# Altium PCB 3轴5.2-PCB-V3.3.PcbDoc (part 2 of 2)
Units mil, origin at the board's own origin, x right, y up, seen from the top; angles counter-clockwise.
Board outline 6000 x 4000 mil, 2 copper layers (Top Layer, Bottom Layer); 198 components, 135 nets, 695 pads, 606 vias.
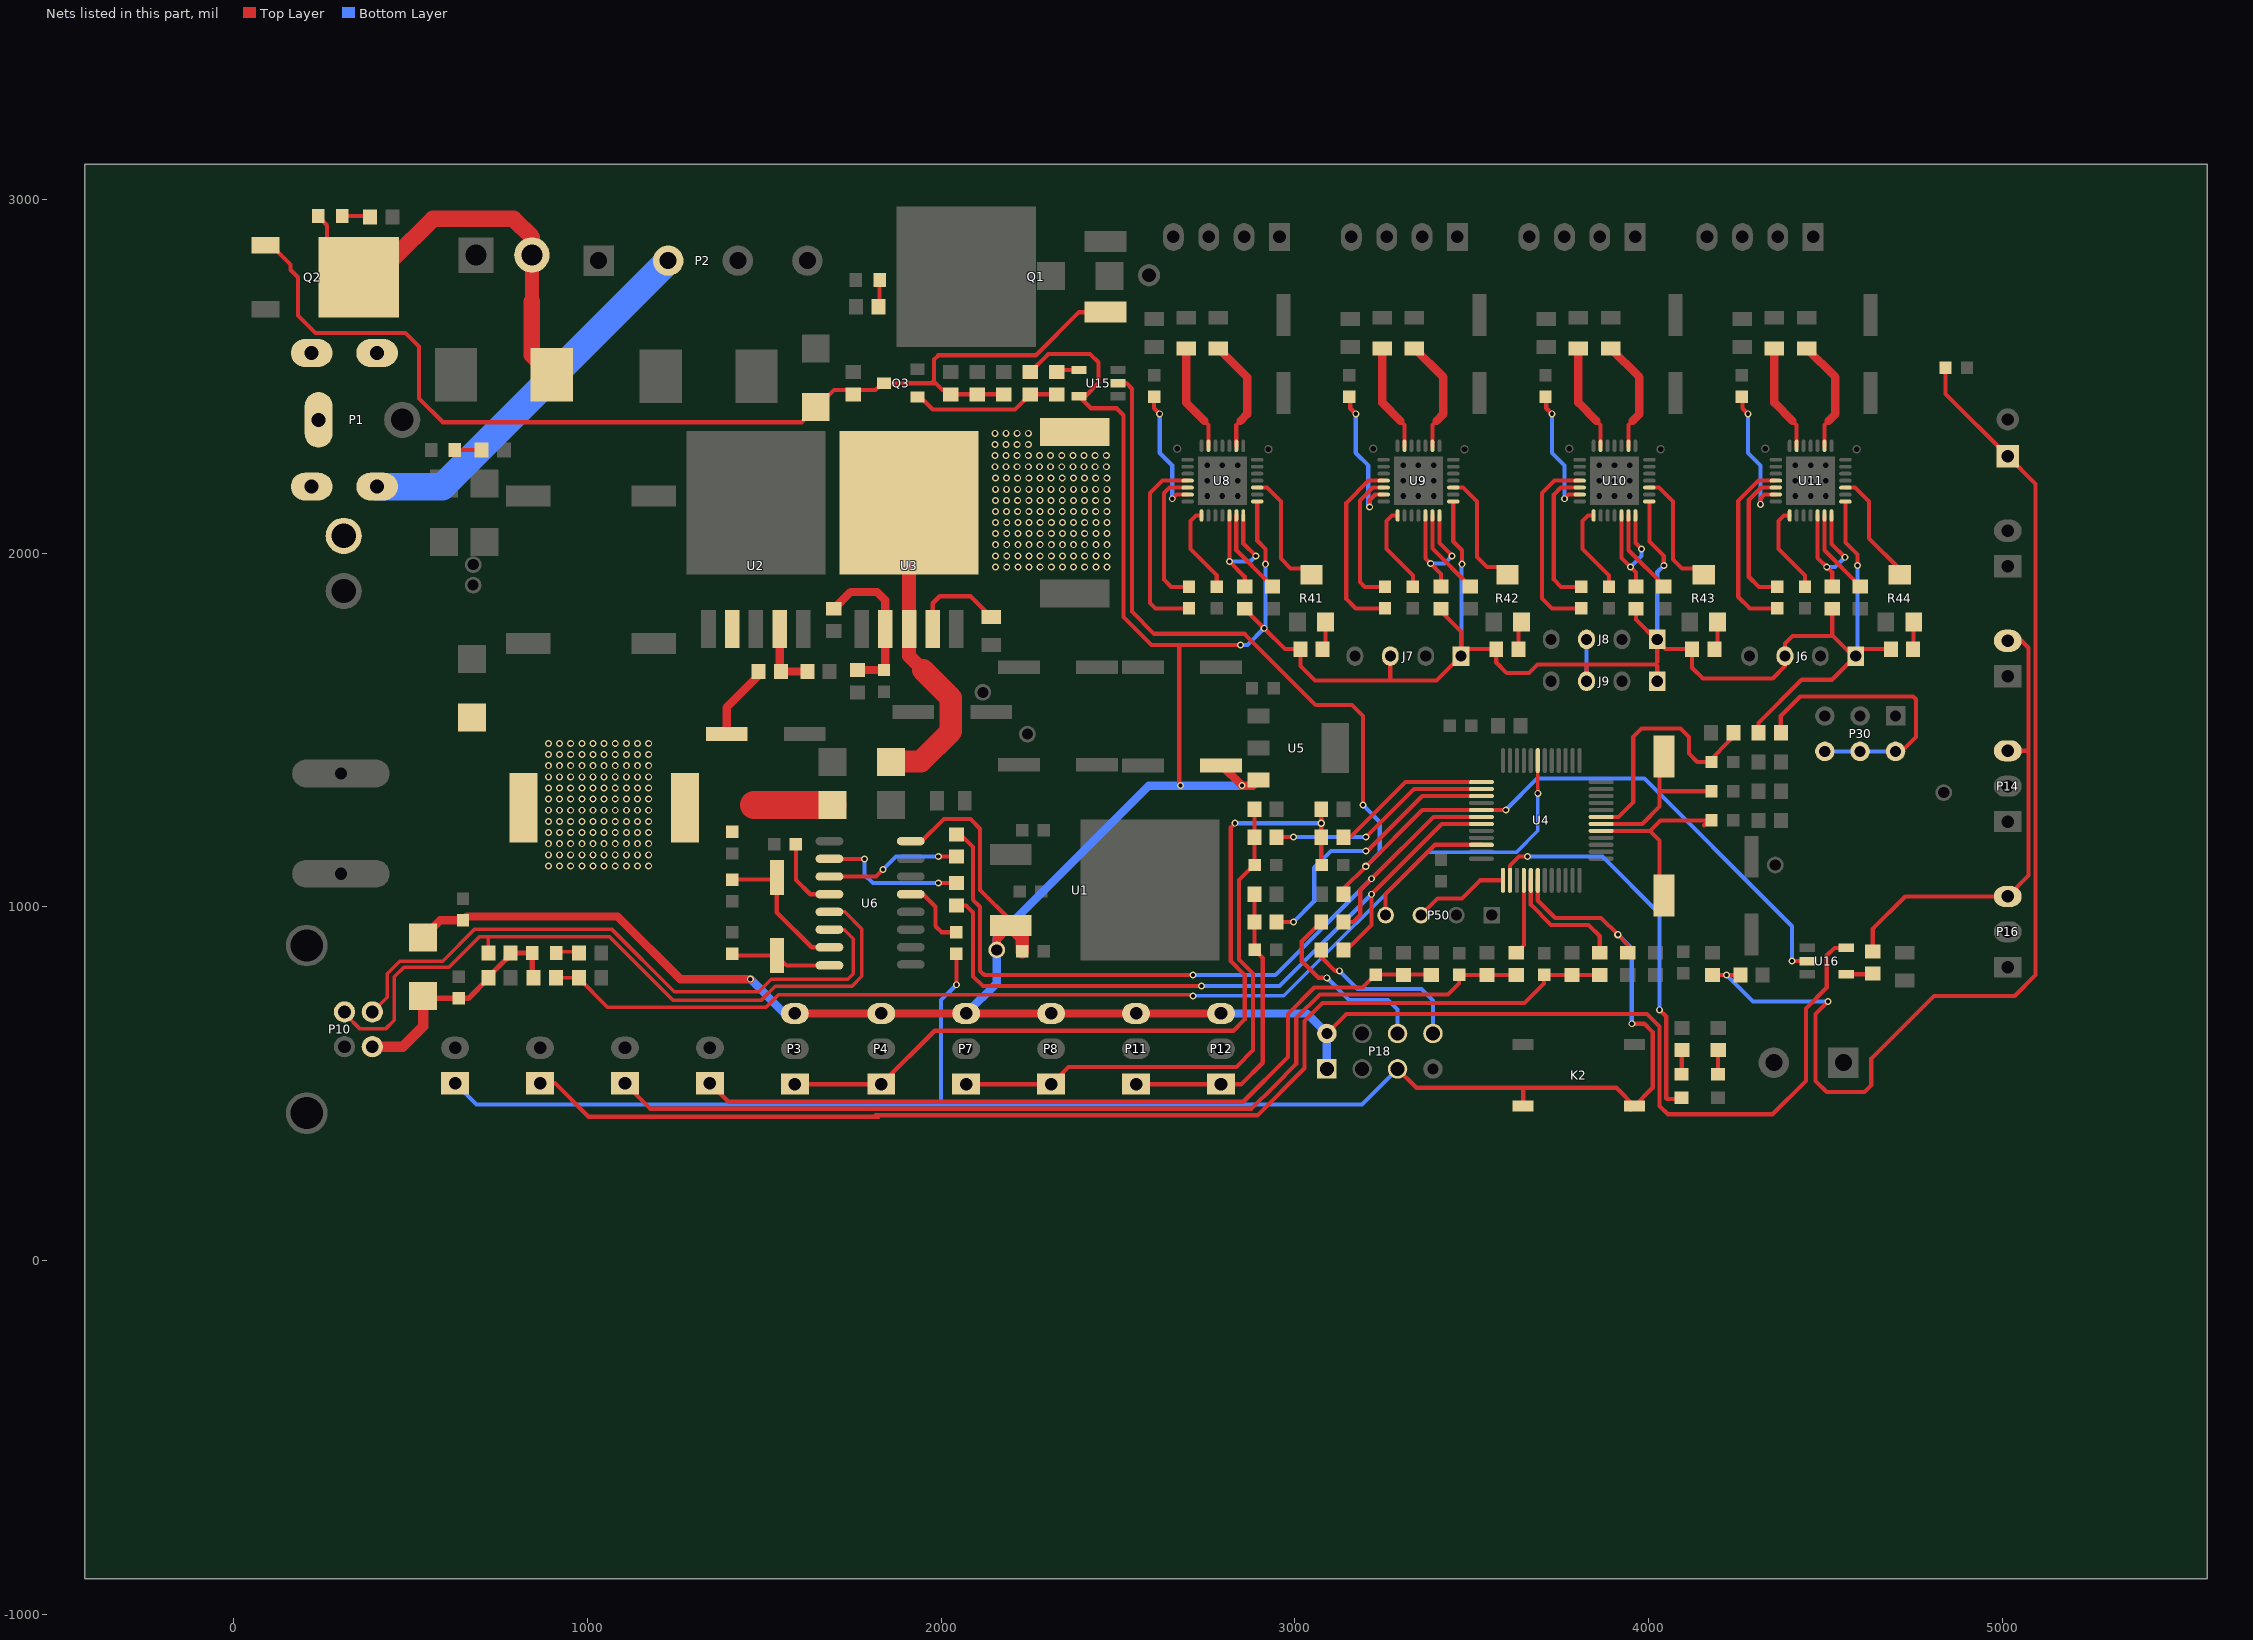
[diagram p2: the nets of this part, all layers, seen from the top]

## Via types
v1: diameter 19.68, hole 11.81, Top Layer to Bottom Layer, 590 vias
v2: diameter 20.87, hole 11.81, Top Layer to Bottom Layer, 9 vias
v3: diameter 19.68, hole 11.81, Top Layer to Bottom Layer, tented both sides, 7 vias

## Nets (pads, with @x,y where several pads share a name; then routed paths per layer and width w, separated by ;. In a path a pad name is that pad's centre, name@x,y a point inside that pad or via, vN(x,y) a via of type N, cw(c..) or ccw(c..) an arc to the next point about the centre after c; other vN are vias at no path point) (continued)
NetC4_1: C4.1 U3.4 | length 265.3
  Top Layer w11.81: U3.4@1976.38,1785.39 1976.38,1858.27 1996.06,1877.95 2082.68,1877.95 C4.1@2137.8,1822.83
NetC10_1: C10.1 C14.2 D7.1 L2.2 R6.2 | length 436.6
  Top Layer w23.62: C10.1@1393.7,1488.19 1393.7,1562.99 1484.25,1653.55 R6.2@1484.25,1665.35
  Top Layer w78.74: 1471.02,1287.4 D7.1@1692.91,1287.4
NetC17_2: C17.2 P3.1 P4.1 R11.1 R60.2 | length 2325.6
  Top Layer w11.81: P3.1@1586.61,498.43 P4.1@1830.71,498.43 1981.89,649.61 2826.77,649.61 2858.27,681.1 2858.27,807.09 2818.9,846.46 2818.9,1224.41 v1(2830.71,1236.22) ; R11.1@3074.81,1275.59 v2(3074.81,1236.22) 3074.81,1119.1 C17.2@3075.8,1118.11
  Bottom Layer w11.81: v1(2830.71,1236.22) v2(3074.81,1236.22)
NetC20_2: C20.2 P7.1 P8.1 R14.1 R61.2 | length 1567.6
  Top Layer w11.81: P7.1@2070.87,498.43 P8.1@2311.02,498.43 2359.84,547.24 2834.65,547.24 2881.89,594.49 2881.89,811.02 2842.52,850.39 2842.52,1075.79 C20.2@2885.83,1119.1 ; R14.1@2885.83,1275.59 R61.2@2885.83,1196.85 C20.2@2885.83,1119.1 ; C20.2@2886.83,1118.11 C20.2@2885.83,1119.1
NetC23_1: C23.1 U6.4 | length 212.7
  Top Layer w11.81: C23.1@1589.56,1177.17 1589.56,1075.8 1629.92,1035.43 U6.4@1684.21,1035.43
NetC25_2: C25.2 P23.1 R90.1 R91.2 | length 3274.2
  Top Layer w11.81: R91.2@4181.1,807.09 v1(4220.47,807.09) R90.1@4259.84,807.09 ; v1(4507.87,732.28) 4472.44,696.85 4472.44,507.87 4503.94,476.38 4610.24,476.38 4629.92,496.06 4629.92,570.87 4807.09,748.03 5035.43,748.03 5094.49,807.09 5094.49,2195.28 P23.1@5015.75,2274.02 4839.58,2450.19 C25.2@4839.58,2523.62
  Bottom Layer w11.81: v1(4220.47,807.09) 4295.28,732.28 v1(4507.87,732.28)
NetC26_2: C26.2 P11.1 P12.1 R19.1 R62.2 | length 869.5
  Top Layer w11.81: P11.1@2551.18,498.43 P12.1@2791.34,498.43 2848.82,498.43 2909.45,559.06 2909.45,855.33 C26.2@2886.83,877.95 2885.83,878.95 R62.2@2885.83,956.69 R19.1@2885.83,1035.43
NetC27_1: C27.1 U6.13 | length 205.8
  Top Layer w11.81: U6.13@1914.21,1035.43 1948.82,1035.43 1984.25,1000 1984.25,944.88 2001,928.14 C27.1@2043.31,928.14
NetC38_1: C38.1 U8.4 | length 548.1
  Top Layer w11.81: U8.4@2696.86,2204.72 2625.98,2204.72 2590.55,2169.29 2590.55,1858.76 2605.8,1843.52 C38.1@2700.79,1843.52
NetC38_2: C38.2 U8.5 | length 397
  Top Layer w11.81: U8.5@2696.86,2185.02 2645.65,2185.02 2629.92,2169.29 2629.92,1925.2 2650.6,1904.52 C38.2@2700.79,1904.52
NetC39_1: C39.1 U9.4 | length 523.7
  Top Layer w11.81: U9.4@3251.19,2204.72 3208.66,2204.72 3145.67,2141.73 3145.67,1870.08 3172.23,1843.52 C39.1@3255.12,1843.52
NetC39_2: C39.2 U9.5 | length 389.1
  Top Layer w11.81: U9.5@3251.19,2185.02 3220.46,2185.02 3184.25,2148.82 3184.25,1918.11 3197.85,1904.52 C39.2@3255.12,1904.52
NetC40_1: C40.1 U10.4 | length 551.7
  Top Layer w11.81: 3738.58,1843.52 3727.35,1843.52 ; U10.4@3805.52,2204.72 3734.65,2204.72 3699.21,2169.29 3699.21,1871.65 3727.35,1843.52 ; C40.1@3809.45,1843.52 3727.35,1843.52
NetC40_2: C40.2 U10.5 | length 407.3
  Top Layer w11.81: U10.5@3805.52,2185.02 3751.95,2185.02 3732.28,2165.35 3732.28,1925.2 3752.96,1904.52 C40.2@3809.45,1904.52
NetC41_1: C41.1 U11.4 | length 524.8
  Top Layer w11.81: U11.4@4359.85,2204.72 4311.02,2204.72 4253.54,2147.24 4253.54,1876.38 4286.41,1843.52 C41.1@4363.78,1843.52
NetC41_2: C41.2 U11.5 | length 399.7
  Top Layer w11.81: U11.5@4359.85,2185.02 4318.88,2185.02 4283.46,2149.61 4283.46,1964.56 4283.46,1933.07 4312.02,1904.52 C41.2@4363.78,1904.52
NetC42_1: C42.1 U8.6 | length 365.7
  Top Layer w11.81: C42.1@2602.36,2445.88 2602.36,2409.45 v1(2618.11,2393.7) ; v1@2657.48,2153.54 v1(2653.54,2153.54) 2665.32,2165.32 U8.6@2696.86,2165.32
  Bottom Layer w11.81: v1(2618.11,2393.7) 2618.11,2283.46 2653.54,2248.03 v1(2653.54,2153.54)
NetC43_1: C43.1 U9.6 | length 412.3
  Top Layer w11.81: C43.1@3156.69,2445.88 3156.69,2409.45 v1(3172.44,2393.7) ; v1(3211.81,2129.92) 3211.81,2149.78 3227.36,2165.32 U9.6@3251.19,2165.32
  Bottom Layer w11.81: v1(3172.44,2393.7) 3172.44,2283.46 3207.87,2248.03 3207.87,2161.41 ; 3207.87,2153.54 3207.87,2161.41 ; v1(3211.81,2129.92) 3207.87,2133.86 3207.87,2161.41
NetC44_1: C44.1 U10.6 | length 365.7
  Top Layer w11.81: C44.1@3711.02,2445.88 3711.02,2409.45 v1(3726.77,2393.7) ; v1@3766.14,2153.54 v1(3762.2,2153.54) 3773.99,2165.32 U10.6@3805.52,2165.32
  Bottom Layer w11.81: v1(3726.77,2393.7) 3726.77,2283.46 3762.2,2248.03 v1(3762.2,2153.54)
NetC45_1: C45.1 U11.6 | length 393.2
  Top Layer w11.81: C45.1@4265.35,2445.88 4265.35,2409.45 v1(4281.1,2393.7) ; v1(4316.54,2137.8) 4316.54,2153.54 4328.32,2165.32 U11.6@4359.85,2165.32
  Bottom Layer w11.81: v1(4281.1,2393.7) 4281.1,2283.46 4316.54,2248.03 v1(4316.54,2137.8)
NetC46_1: C46.1 U8.8 | length 255
  Top Layer w11.81: U8.8@2736.18,2106.29 2720.47,2106.29 2704.72,2090.55 2704.72,2011.44 2779.53,1936.63 C46.1@2779.53,1904.52
NetC47_1: C47.1 U9.8 | length 250.4
  Top Layer w11.81: U9.8@3290.51,2106.29 3274.8,2106.29 3259.05,2090.55 3259.05,2011.44 3333.86,1936.63 ; C47.1@3333.86,1904.52 3333.86,1932.04
NetC48_1: C48.1 U10.8 | length 255
  Top Layer w11.81: U10.8@3844.84,2106.29 3829.13,2106.29 3813.39,2090.55 3813.39,2011.44 3888.19,1936.63 3888.19,1925.19 C48.1@3888.19,1904.52
NetC49_1: C49.1 U11.8 | length 253.5
  Top Layer w11.81: U11.8@4399.17,2106.29 4383.46,2106.29 4367.72,2090.55 4367.72,2011.44 4442.52,1936.63 ; C49.1@4442.52,1904.52 4442.52,1935.18
NetC54_1: C54.1 U6.7 Y1.2 | length 416.6
  Top Layer w11.81: C54.1@1409.45,1076.75 1529.5,1076.75 Y1.2@1535.43,1082.68 1535.43,984.25 1634.25,885.43 U6.7@1684.21,885.43
NetC55_1: C55.1 U6.8 Y1.1 | length 288.4
  Top Layer w11.81: C55.1@1409.45,867.14 1414.39,862.2 Y1.1@1535.43,862.2 1563.38,834.25 U6.8@1684.21,834.25
NetC56_1: C56.1 R1.1 R7.2 U3.2 | length 448.3
  Top Layer w23.62: R7.2@1696.85,1842.52 1744.09,1889.76 1818.9,1889.76 1842.52,1866.14 U3.2@1842.52,1785.39 1842.52,1673.23 C56.1@1838.58,1669.29 R1.1@1763.78,1669.29
NetC60_2: C60.2 P6.1 R63.2 R66.1 | length 3306.8
  Top Layer w11.81: P6.1@866.14,501.18 908.27,501.18 1003.06,406.39 1811.02,406.39 ; 1822.83,406.39 1811.02,406.39 ; R63.2@3862.2,807.09 R66.1@3783.46,807.09 3705.72,807.09 C60.2@3704.72,808.08 3704.72,783.46 3649.61,728.35 3078.74,728.35 3027.56,677.17 3027.56,543.31 2894.57,410.32 1814.96,410.32 1811.02,406.39
NetC61_2: C61.2 P9.1 R64.2 R67.1 | length 2798.1
  Top Layer w11.81: P9.1@1106.3,501.18 1106.3,500 1177.17,429.13 2877.95,429.13 2940.94,492.12 3003.94,555.12 3003.94,685.04 3070.87,751.97 3433.07,751.97 3464.57,783.46 C61.2@3464.57,808.08 3465.56,807.09 R67.1@3543.31,807.09 R64.2@3625.98,807.09
NetC62_2: C62.2 P13.1 R65.2 R68.1 | length 2281.8
  Top Layer w11.81: P13.1@1346.46,501.18 1398.82,448.82 2854.33,448.82 2980.32,574.8 2980.32,696.85 3055.12,771.65 3118.1,771.65 3191.92,771.65 C62.2@3228.35,808.08 3384.83,808.08 R65.2@3385.83,807.09
NetD4_1: D4.1 R3.2 | length 71.8
  Top Layer w11.81: D4.1@4196.18,522.99 4196.85,523.66 R3.2@4196.85,594.49
NetD5_2: D5.2 L2.1 U2.2
  other v1: 889.76,1115.42 921.26,1115.42 952.76,1115.42 984.25,1115.42 1015.75,1115.42 1047.24,1115.42 1078.74,1115.42 1110.24,1115.42 1141.73,1115.42 1173.23,1115.42 889.76,1146.92 921.26,1146.92 952.76,1146.92 984.25,1146.92 1015.75,1146.92 1047.24,1146.92 1078.74,1146.92 1110.24,1146.92 1141.73,1146.92 1173.23,1146.92 889.76,1178.41 921.26,1178.41 952.76,1178.41 984.25,1178.41 1015.75,1178.41 1047.24,1178.41 1078.74,1178.41 1110.24,1178.41 1141.73,1178.41 1173.23,1178.41 889.76,1209.91 921.26,1209.91 952.76,1209.91 984.25,1209.91 1015.75,1209.91 1047.24,1209.91 1078.74,1209.91 1110.24,1209.91 1141.73,1209.91 1173.23,1209.91 889.76,1241.4 921.26,1241.4 952.76,1241.4 984.25,1241.4 1015.75,1241.4 1047.24,1241.4 1078.74,1241.4 1110.24,1241.4 1141.73,1241.4 1173.23,1241.4 889.76,1272.9 921.26,1272.9 952.76,1272.9 984.25,1272.9 1015.75,1272.9 1047.24,1272.9 1078.74,1272.9 1110.24,1272.9 1141.73,1272.9 1173.23,1272.9 889.76,1304.4 921.26,1304.4 952.76,1304.4 984.25,1304.4 1015.75,1304.4 1047.24,1304.4 1078.74,1304.4 1110.24,1304.4 1141.73,1304.4 1173.23,1304.4 889.76,1335.89 921.26,1335.89 952.76,1335.89 984.25,1335.89 1015.75,1335.89 1047.24,1335.89 1078.74,1335.89 1110.24,1335.89 1141.73,1335.89 1173.23,1335.89 889.76,1367.39 921.26,1367.39 952.76,1367.39 984.25,1367.39 1015.75,1367.39 1047.24,1367.39 1078.74,1367.39 1110.24,1367.39 1141.73,1367.39 1173.23,1367.39 889.76,1398.88 921.26,1398.88 952.76,1398.88 984.25,1398.88 1015.75,1398.88 1047.24,1398.88 1078.74,1398.88 1110.24,1398.88 1141.73,1398.88 1173.23,1398.88 889.76,1430.38 921.26,1430.38 952.76,1430.38 984.25,1430.38 1015.75,1430.38 1047.24,1430.38 1078.74,1430.38 1110.24,1430.38 1141.73,1430.38 1173.23,1430.38 889.76,1461.88 921.26,1461.88 952.76,1461.88 984.25,1461.88 1015.75,1461.88 1047.24,1461.88 1078.74,1461.88 1110.24,1461.88 1141.73,1461.88 1173.23,1461.88
NetD6_2: D6.2 L1.1 U3.3 | length 731.1
  Top Layer w39.37: U3.3@1909.45,1977.62 U3.3@1909.45,1785.39 1909.45,1708.66 1948.82,1669.29
  Top Layer w62.99: D6.2@1862.2,1410.83 1942.32,1410.83 2027.56,1496.06 2027.56,1590.55 1948.82,1669.29
  other v1: 2154.08,1960.63 2185.58,1960.63 2217.08,1960.63 2248.57,1960.63 2280.07,1960.63 2311.56,1960.63 2343.06,1960.63 2374.56,1960.63 2406.05,1960.63 2437.55,1960.63 2469.04,1960.63 2154.08,1992.13 2185.58,1992.13 2217.08,1992.13 2248.57,1992.13 2280.07,1992.13 2311.56,1992.13 2343.06,1992.13 2374.56,1992.13 2406.05,1992.13 2437.55,1992.13 2469.04,1992.13 2154.08,2023.62 2185.58,2023.62 2217.08,2023.62 2248.57,2023.62 2280.07,2023.62 2311.56,2023.62 2343.06,2023.62 2374.56,2023.62 2406.05,2023.62 2437.55,2023.62 2469.04,2023.62 2154.08,2055.12 2185.58,2055.12 2217.08,2055.12 2248.57,2055.12 2280.07,2055.12 2311.56,2055.12 2343.06,2055.12 2374.56,2055.12 2406.05,2055.12 2437.55,2055.12 2469.04,2055.12 2154.08,2086.61 2185.58,2086.61 2217.08,2086.61 2248.57,2086.61 2280.07,2086.61 2311.56,2086.61 2343.06,2086.61 2374.56,2086.61 2406.05,2086.61 2437.55,2086.61 2469.04,2086.61 2153.54,2117.39 2185.04,2117.39 2216.54,2117.39 2248.03,2117.39 2279.53,2117.39 2311.02,2117.39 2342.52,2117.39 2374.02,2117.39 2405.51,2117.39 2437.01,2117.39 2468.5,2117.39 2153.54,2148.88 2185.04,2148.88 2216.54,2148.88 2248.03,2148.88 2279.53,2148.88 2311.02,2148.88 2342.52,2148.88 2374.02,2148.88 2405.51,2148.88 2437.01,2148.88 2468.5,2148.88 2153.54,2180.38 2185.04,2180.38 2216.54,2180.38 2248.03,2180.38 2279.53,2180.38 2311.02,2180.38 2342.52,2180.38 2374.02,2180.38 2405.51,2180.38 2437.01,2180.38 2468.5,2180.38 2153.54,2211.87 2185.04,2211.87 2216.54,2211.87 2248.03,2211.87 2279.53,2211.87 2311.02,2211.87 2342.52,2211.87 2374.02,2211.87 2405.51,2211.87 2437.01,2211.87 2468.5,2211.87 2152.12,2244.09 2183.61,2244.09 2215.11,2244.09 2246.6,2244.09 2278.1,2244.09 2309.6,2244.09 2341.09,2244.09 2372.59,2244.09 2404.08,2244.09 2435.58,2244.09 2467.08,2244.09 2152.12,2275.59 2183.61,2275.59 2215.11,2275.59 2246.6,2275.59 2278.1,2275.59 2309.6,2275.59 2341.09,2275.59 2372.59,2275.59 2404.08,2275.59 2435.58,2275.59 2467.08,2275.59 2152.12,2307.09 2183.61,2307.09 2215.11,2307.09 2246.6,2307.09 2152.12,2338.58 2183.61,2338.58 2215.11,2338.58 2246.6,2338.58
NetD10_1: D10.1 R4.1 | length 75.7
  Top Layer w11.81: D10.1@625.35,2292.01 626.02,2291.34 R4.1@700.79,2291.34
NetD12_1: D12.1 R71.1 | length 71.8
  Top Layer w11.81: D12.1@4093.82,522.99 4093.82,593.82 R71.1@4094.49,594.49
NetD12_2: D12.2 U4.38 | length 1116.7
  Top Layer w11.81: U4.38@3608.27,1074.8 3608.27,1116.14 3633.86,1141.73 v1(3657.48,1141.73) ; v1(4031.5,708.66) 4050.31,689.85 4050.31,457.57 4051.81,456.06 D12.2@4093.82,456.06
  Bottom Layer w11.81: v1(3657.48,1141.73) 3870.08,1141.73 4031.5,980.31 v1(4031.5,708.66)
NetD13_2: D13.2 R76.2 | length 62.9
  Top Layer w10: D13.2@912.59,873.35 912.92,873.02 R76.2@975.37,873.02
NetD15_1: D15.1 R21.2 | length 76.8
  Top Layer w11.81: R21.2@1822.83,2696.85 1826.14,2700.16 D15.1@1826.14,2772.32
NetD16_1: D16.1 R58.2 | length 80.6
  Top Layer w11.81: D16.1@306.46,2953.09 382.8,2953.09 R58.2@385.83,2950.06
NetD16_2: D16.2 DZ1.1 P17.2 Q2.2 | length 1305.4
  Top Layer w11.81: D16.2@239.53,2953.09 239.53,2951.12 263.78,2926.87 263.78,2869.5 Q2.2@353.3,2779.98
  Top Layer w39.37: 843.04,2711.29 P17.2@843.04,2842.52 P17.2@843.04,2850.39
  Top Layer w47.24: Q2.2@365.11,2768.17 Q2.2@435.98,2839.04 ; Q2.2@365.16,2768.13 429.44,2832.41 450.52,2832.41 562.99,2944.88 791.34,2944.88 843.04,2893.18 P17.2@843.04,2850.39 ; 843.04,2711.29 843.04,2559.91 DZ1.1@899.02,2503.94
NetDZ4_2: DZ4.2 Q1.1 Q2.1 Q3.2 R27.1 R57.1 R77.1 R78.1 | length 3116.1
  Top Layer w11.81: Q2.1@89.52,2870.53 105.27,2870.53 160.28,2815.53 160.28,2801 181.41,2779.88 181.41,2671.81 231.16,2622.05 485.16,2622.05 523.62,2583.59 523.62,2437.37 590.91,2370.08 1606.3,2370.08 1696.85,2460.63 1814.96,2460.63 1834.65,2480.31 Q3.2@1838.58,2480.31 1972.44,2480.31 ; R27.1@2027.56,2448.82 R77.1@2102.36,2448.82 R78.1@2177.17,2448.82 ; R27.1@2027.56,2460.63 2003.93,2460.63 1984.25,2480.31 1972.44,2480.31 ; Q1.1@2464.57,2681.1 2389.76,2681.1 2267.72,2559.06 1992.13,2559.06 1980.32,2547.24 1980.32,2488.19 1972.44,2480.31
NetK1_1: P1.2 P1.3 P1.4 P1.5 P1.6 P2.2 P15.1 | length 1115.1
  Bottom Layer w11.81: P2.2@1228.35,2799.21 P2.2@1228.35,2826.77
  Bottom Layer w78: P1.4@405.51,2187.8 589.37,2187.8 P2.2@1228.35,2826.77
NetP18_6: P18.6 R22.2 | length 528.4
  Top Layer w11.81: R22.2@3074.81,956.69 3019.68,901.57 3019.68,846.46 3066.93,799.21 v1(3090.55,799.21)
  Bottom Layer w11.81: v1(3090.55,799.21) 3153.54,736.22 3263.78,736.22 3290.55,709.45 P18.6@3290.55,641.73
NetP18_8: P18.8 R25.2 | length 480
  Top Layer w11.81: R25.2@3074.81,877.95 3074.81,858.27 3114.17,818.9 v1(3125.98,818.9)
  Bottom Layer w11.81: v1(3125.98,818.9) 3177.17,767.71 3358.27,767.71 3390.55,735.43 P18.8@3390.55,641.73
NetP30_2: P30.2 P30.4 P30.6 R52.2 | length 836
  Top Layer w11.81: R52.2@4374.01,1492.13 4374.01,1500 4374.01,1539.37 4429.13,1594.49 4511.8,1594.49 4748.03,1594.49 4755.91,1586.61 4755.91,1480.32 4714.96,1439.37 P30.2@4698.43,1439.37
  Bottom Layer w11.81: P30.6@4498.43,1439.37 P30.4@4598.43,1439.37 P30.2@4698.43,1439.37
NetQ3_1: Q3.1 R80.2 R81.1 | length 536.6
  Top Layer w11.81: Q3.1@1940.94,2440.94 1976.38,2405.51 ; 2094.49,2405.51 1976.38,2405.51 ; R80.2@2326.77,2448.82 R81.1@2251.97,2448.82 2208.66,2405.51 1976.38,2405.51
NetR6_1: R6.1 R8.2 U2.4 | length 196.5
  Top Layer w23.62: U2.4@1543.31,1785.39 1543.31,1669.29 R6.1@1547.24,1665.35 R8.2@1622.05,1665.35
NetR15_1: R15.1 U6.2 | length 413.8
  Top Layer w11.81: U6.2@1684.21,1135.43 v1(1783.46,1135.43) ; v1@1992.13,1066.92 R15.1@2043.31,1066.92
  Bottom Layer w11.81: v1(1783.46,1135.43) 1783.46,1090.55 1807.09,1066.93 v1(1992.13,1066.93)
NetR16_1: R16.1 U6.3 | length 382.4
  Top Layer w11.81: U6.3@1684.21,1085.43 1816.14,1085.43 v1(1836.16,1105.45) ; v1(1992.13,1141.73) R16.1@2043.31,1141.73
  Bottom Layer w11.81: v1(1836.16,1105.45) 1872.44,1141.73 v1(1992.13,1141.73)
NetR29_1: R29.1 U8.27 | length 301.7
  Top Layer w11.81: 2744.09,2374.02 2755.88,2362.23 U8.27@2755.88,2303.14
  Top Layer w23.62: R29.1@2692.91,2578.74 2692.91,2425.17 2744.06,2374.02
NetR30_2: R30.2 U8.23 | length 322
  Top Layer w11.81: U8.23@2834.68,2303.14 2834.68,2362.23 2846.46,2374.02
  Top Layer w23.62: R30.2@2783.98,2578.74 2865.4,2497.32 2865.4,2392.96 2846.46,2374.02
NetR31_1: R31.1 U9.27 | length 301.7
  Top Layer w11.81: 3298.43,2374.02 3310.21,2362.23 U9.27@3310.21,2303.14
  Top Layer w23.62: R31.1@3247.24,2578.74 3247.24,2425.17 3298.4,2374.02
NetR32_2: R32.2 U9.23 | length 322
  Top Layer w11.81: U9.23@3389.01,2303.14 3389.01,2362.23 3400.79,2374.02
  Top Layer w23.62: R32.2@3338.31,2578.74 3419.73,2497.32 3419.73,2392.96 3400.79,2374.02
NetR33_1: R33.1 U10.27 | length 301.7
  Top Layer w11.81: 3852.76,2374.02 3864.54,2362.23 U10.27@3864.54,2303.14
  Top Layer w23.62: R33.1@3801.58,2578.74 3801.58,2425.17 3852.73,2374.02
NetR34_2: R34.2 U10.23 | length 322
  Top Layer w11.81: U10.23@3943.34,2303.14 3943.34,2362.23 3955.12,2374.02
  Top Layer w23.62: R34.2@3892.64,2578.74 3974.06,2497.32 3974.06,2392.96 3955.12,2374.02
NetR35_1: R35.1 U11.27 | length 301.7
  Top Layer w11.81: 4407.09,2374.02 4418.87,2362.23 U11.27@4418.87,2303.14
  Top Layer w23.62: R35.1@4355.91,2578.74 4355.91,2425.17 4407.06,2374.02
NetR36_2: R36.2 U11.23 | length 322
  Top Layer w11.81: U11.23@4497.67,2303.14 4497.67,2362.23 4509.45,2374.02
  Top Layer w23.62: R36.2@4446.97,2578.74 4528.39,2497.32 4528.39,2392.96 4509.45,2374.02
NetR37_1: R37.1 R41.3 | length 80
  Top Layer w11.81: R37.1@3078.74,1728.35 3086.61,1736.22 R41.3@3086.61,1805.12
NetR38_1: R38.1 R42.3 | length 80.3
  Top Layer w11.81: R38.1@3632.55,1728.35 3632.55,1796.72 R42.3@3640.95,1805.12
NetR39_1: R39.1 R43.3 | length 80.5
  Top Layer w11.81: R39.1@4186.35,1728.35 4195.28,1737.27 R43.3@4195.28,1805.12
NetR40_1: R40.1 R44.3 | length 80.7
  Top Layer w11.81: R40.1@4740.16,1728.35 4749.61,1737.8 R44.3@4749.61,1805.12
NetR41_2: R41.2 U8.17 | length 350
  Top Layer w11.81: U8.17@2893.71,2185.02 2921.27,2185.02 2960.63,2145.67 2960.63,1984.25 2988.19,1956.69 3029.53,1956.69 R41.2@3047.24,1938.98
NetR42_2: R42.2 U9.17 | length 347.2
  Top Layer w11.81: U9.17@3448.04,2185.02 3475.61,2185.02 3514.96,2145.67 3514.96,1988.98 3543.31,1960.63 3579.92,1960.63 R42.2@3601.58,1938.98
NetR43_2: R43.2 U10.17 | length 361.8
  Top Layer w11.81: U10.17@4002.37,2185.02 4029.94,2185.02 4069.29,2145.67 4069.29,2098.43 4069.29,1981.89 4094.49,1956.69 4155.91,1956.69 R43.2@4155.91,1938.98
NetR44_2: R44.2 U11.17 | length 325.8
  Top Layer w11.81: U11.17@4556.7,2185.02 4584.27,2185.02 4623.62,2145.67 4623.62,2133.85 4623.62,2041.73 4710.24,1955.12 R44.2@4710.24,1938.98
NetR45_2: R45.2 U8.12 U8.14 | length 428.9
  Top Layer w11.81: U8.12@2814.98,2106.29 v1(2814.98,1976.36) 2858.27,1933.07 R45.2@2858.27,1905.51 ; U8.14@2854.38,2106.29 2854.38,2027.51 v1(2889.76,1992.13)
  Bottom Layer w11.81: v1(2814.98,1976.36) 2874,1976.36 v1(2889.76,1992.13)
NetR46_2: R46.2 U9.12 U9.14 | length 406.8
  Top Layer w11.81: U9.12@3369.31,2106.29 3369.31,1985.02 v1(3384.24,1970.09) 3413.39,1940.94 R46.2@3413.39,1905.51 ; U9.14@3408.71,2106.29 3408.71,2028.3 3437.01,2000
  Bottom Layer w11.81: v1(3384.24,1970.09) 3422.85,1970.09 v1(3444.88,1992.13)
NetR47_2: R47.2 U10.12 U10.14 | length 383.6
  Top Layer w11.81: U10.12@3923.64,2106.29 3923.64,1985.81 v1(3948.82,1960.63) 3964.57,1944.88 R47.2@3964.57,1905.51 ; U10.14@3963.04,2106.29 3963.04,2029.09 v1(3980.32,2011.81)
  Bottom Layer w11.81: v1(3948.82,1960.63) 3980.32,1992.13 v1(3980.32,2011.81)
NetR48_2: R48.2 U11.12 U11.14 | length 414.4
  Top Layer w11.81: U11.12@4477.97,2106.29 4477.97,1986.6 v1(4503.94,1960.63) 4519.68,1944.88 R48.2@4519.68,1905.51 ; U11.14@4517.37,2106.29 4517.37,2025.94 v1(4555.12,1988.19)
  Bottom Layer w11.81: v1(4503.94,1960.63) 4527.56,1960.63 v1(4555.12,1988.19)
NetR53_2: R53.2 U8.13 | length 243.2
  Top Layer w11.81: U8.13@2834.68,2106.29 2834.68,2007.84 2927.16,1915.35 R53.2@2937.01,1905.51
NetR54_2: R54.2 U9.13 | length 245.1
  Top Layer w11.81: U9.13@3389.01,2106.29 3389.01,2012.57 R54.2@3496.06,1905.51
NetR55_2: R55.2 U10.13 | length 242.2
  Top Layer w11.81: U10.13@3943.34,2106.29 3943.34,2007.84 4043.31,1907.87 R55.2@4043.31,1905.51
NetR56_2: R56.2 U11.13 | length 242.5
  Top Layer w11.81: U11.13@4497.67,2106.29 4497.67,2007.84 4598.43,1907.08 R56.2@4598.43,1905.51
NetR59_1: R59.1 U16.4 | length 75.6
  Top Layer w11.81: U16.4@4559.06,809.06 4631.89,809.06 R59.1@4633.86,811.03
NetR80_1: R80.1 U15.4 | length 65.4
  Top Layer w11.81: R80.1@2326.77,2511.81 2332.68,2517.72 U15.4@2389.76,2517.72
NRST: C102.2 R104.2 U4.7 | length 693.3
  Top Layer w11.81: U4.7@3866.14,1253.94 3915.35,1253.94 3956.69,1295.28 3956.69,1480.32 3980.31,1503.94 4090.55,1503.94 4114.17,1480.32 4114.17,1433.07 4137.79,1409.45 C102.2@4178.16,1409.45 ; C102.2@4173.73,1413.88 4232.28,1472.44 R104.2@4232.28,1492.13
PROBE: R63.1 U4.41 | length 347.7
  Top Layer w11.81: U4.41@3667.32,1074.8 3667.32,1005.91 3724.41,948.82 3830.71,948.82 3862.2,917.32 R63.1@3862.2,870.08
PWM: P14.3 P16.3 P25.2 R59.2 | length 1336.9
  Top Layer w11.81: R59.2@4633.86,874.01 4633.86,937.01 4725.98,1029.13 P16.3@5015.75,1029.13 5074.8,1088.19 5074.8,1440.95 ; P14.3@5015.75,1440.95 5074.8,1440.95 ; P25.2@5015.75,1751.97 5055.12,1751.97 5074.8,1732.28 5074.8,1440.95
RST: C27.2 K2.1 K2.3 P5.1 P18.5 R72.2 U4.42 | length 4911.4
  Top Layer w11.81: v1(2043.31,779.53) C27.2@2043.31,867.14 ; P18.5@3290.55,541.73 3344.1,488.19 3649.61,488.19 ; K2.3@3645.67,437.01 3645.67,484.25 3649.61,488.19 ; U4.42@3687.01,1074.8 3687.01,1017.72 3736.22,968.5 3866.14,968.5 v2(3913.39,921.26) 3940.94,893.7 R72.2@3940.94,870.08 ; K2.1@3948.82,425.2 K2.1@3960.63,437.01 ; v1(3952.76,669.29) 3988.19,669.29 4011.81,645.67 4011.81,488.19 K2.1@3960.63,437.01 ; 3649.61,488.19 3909.45,488.19 K2.1@3960.63,437.01
  Bottom Layer w11.81: P5.1@625.98,501.18 686.22,440.94 2000,440.94 ; v1(2043.31,779.53) 2000,736.22 2000,440.94 ; P18.5@3290.55,541.73 3189.76,440.94 2000,440.94 ; v2(3913.39,921.26) 3952.76,881.89 v1(3952.76,669.29)
RUN: R64.1 U4.40 | length 213.7
  Top Layer w11.81: R64.1@3625.98,870.08 3647.64,891.73 U4.40@3647.64,1074.8
RXD: R15.2 R25.1 U4.31 | length 2069.6
  Top Layer w11.81: R15.2@2043.31,1003.94 2070.87,1003.94 2090.55,984.25 2090.55,803.15 2118.11,775.59 v1(2736.22,775.59) ; R25.1@3137.79,877.95 3145.67,877.95 3216.54,948.82 v1(3216.54,1035.43) 3415.35,1234.25 U4.31@3527.56,1234.25
  Bottom Layer w11.81: v1(2736.22,775.59) 2956.69,775.59 v1(3216.54,1035.43)
SPINDLE_PWM: R70.2 U4.29 U15.2 U16.2 | length 3639.6
  Top Layer w11.81: U15.2@2500,2480.32 2523.62,2480.31 2539.37,2464.57 2539.37,1834.65 2602.36,1771.65 2858.27,1771.65 3059.05,1570.87 3161.42,1570.87 3192.91,1539.37 v1(3192.91,1287.4) ; R70.2@3137.79,1035.43 3137.79,1051.18 v2(3200.79,1114.17) 3360.24,1273.62 U4.29@3527.56,1273.62 v1(3596.46,1273.62) ; v1(4405.51,846.46) U16.2@4448.82,846.46
  Bottom Layer w11.81: v1(3192.91,1287.4) 3240.16,1240.16 3240.16,1153.54 v2(3200.79,1114.17) ; v1(3596.46,1273.62) 3685.04,1362.2 3988.18,1362.2 4372.84,977.54 4405.51,944.87 v1(4405.51,846.46)
SWCLK: P50.3 U4.37 | length 272.7
  Top Layer w11.81: P50.3@3356.69,976.38 3403.94,1023.62 3472.44,1023.62 3523.62,1074.8 U4.37@3588.58,1074.8
SWDIO: P50.4 U4.34 | length 388.3
  Top Layer w11.81: P50.4@3256.69,976.38 3256.69,1036.22 3395.67,1175.2 U4.34@3527.56,1175.2
TXD: R16.2 R22.1 U4.30 | length 2199.3
  Top Layer w11.81: R16.2@2043.31,1204.72 2055.12,1204.72 2090.55,1169.29 2090.55,1019.69 2110.24,1000 2110.24,818.9 2122.05,807.09 v1(2712.6,807.09) ; R22.1@3137.79,956.69 3165.35,956.69 3185.04,976.38 3185.04,1047.24 v1(3217.04,1079.24) 3391.73,1253.94 U4.30@3527.56,1253.94
  Bottom Layer w11.81: v1(2712.6,807.09) 2944.88,807.09 v1(3217.04,1079.24)
USB-CHK: R74.2 R75.1 U4.19 | length 3218.8
  Top Layer w10: R74.2@910.88,799.01 R75.1@976.04,799.01 976.04,797.04 1056.55,716.54 1505.19,716.54 1539.37,750.72 2709.91,750.72 v1(2712.6,748.03) ; v1(3687.01,1320.87) U4.19@3687.01,1413.39
  Bottom Layer w10: v1(2712.6,748.03) 2968.5,748.03 3374.02,1153.54 3625.98,1153.54 3687.01,1214.57 v1(3687.01,1320.87)
USB_DM: P10.2 U6.6 | length 1779.3
  Top Layer w10: P10.2@379.92,702.76 P10.2@391.93,702.76 433.62,744.44 433.62,810.48 469.59,846.46 591.27,846.46 681.82,937 765,937 ; 765.01,937.01 1068.18,937.01 1245.34,759.84 1484.25,759.84 1519.68,795.28 1736.22,795.28 1751.97,811.02 1751.97,909.45 1725.98,935.43 U6.6@1684.21,935.43
USB_DP: P10.3 R73.2 U6.5 | length 2043.4
  Top Layer w10: P10.3@319.41,691.79 355.48,655.72 430.46,655.72 453.93,679.19 453.93,801.78 481.61,829.46 608.63,829.46 693.8,914.63 717.87,914.63 ; R73.2@719.77,869.08 719.77,912.73 717.87,914.63 ; U6.5@1684.21,985.43 1727.17,985.43 1775.59,937.01 1775.59,803.15 1748.03,775.59 1531.5,775.59 1492.13,736.22 1241.4,736.22 1062.99,914.63 717.87,914.63
VCC: C7.1 C9.2 C18.2 D9.2 J6.1 J6.3 J7.1 J7.3 J8.1 J8.3 J9.1 J9.3 P3.3 P4.3 P7.3 P8.3 P11.3 P12.3 P18.1 P18.2 pad.1@2157.48,877.95 R37.2 R38.2 R39.2 R40.2 R45.1 R46.1 R47.1 R48.1 R52.1 R81.2 U1.3 U5.3 U6.16 U8.15 U9.15 U10.15 U11.15 U15.5 U16.5 | length 13813.5
  Top Layer w11.81: U6.16@1914.21,1185.43 1945.28,1185.43 2007.87,1248.03 2082.68,1248.03 2110.24,1220.47 2110.24,1047.24 2196.85,960.63 U1.3@2196.85,947.24 ; R81.2@2251.97,2511.81 2303.15,2562.99 2421.26,2562.99 2444.88,2539.37 2444.88,2480.31 2407.48,2442.91 U15.5@2389.76,2442.91 ; U15.5@2389.76,2442.91 2423.23,2409.45 2496.06,2409.45 2515.75,2389.76 2515.75,1818.9 2594.49,1740.16 2673.23,1740.16 ; v1(2677.17,1342.52) 2673.23,1346.46 2673.23,1740.16 ; v1(2846.46,1740.16) 2673.23,1740.16 ; R45.1@2858.27,1842.52 v1(2913.39,1787.4) 2972.44,1728.35 R37.2@3015.75,1728.35 3015.75,1681.1 3057.48,1639.37 3400.79,1639.37 J7.1@3470.08,1708.66 ; U8.15@2893.71,2141.73 2893.71,2035.43 2917.32,2011.81 v1(2917.32,1968.5) ; P18.2@3090.55,641.73 3145.67,696.85 3996.06,696.85 4031.5,661.42 4031.5,437.01 4055.12,413.39 4350.39,413.39 4444.88,507.87 4444.88,712.6 4503.94,771.65 4503.94,862.2 4525.59,883.86 U16.5@4559.06,883.86 ; 3270.08,1640.16 J7.3@3270.08,1708.66 ; R46.1@3413.39,1842.52 3413.39,1834.65 3470.08,1777.95 J7.1@3470.08,1708.66 ; U9.15@3448.04,2141.73 3448.04,2032.28 3472.44,2007.87 v1(3472.44,1968.5) ; R38.2@3570.87,1727.04 R38.2@3569.56,1728.35 ; J9.3@3824.8,1637.8 J9.3@3824.8,1643.7 ; J9.3@3830.71,1637.8 J9.3@3824.8,1643.7 ; R47.1@3964.57,1842.52 3964.57,1812.2 J8.1@4024.8,1751.97 ; U10.15@4002.37,2141.73 4002.37,2033.07 4043.31,1992.13 v1(4043.31,1964.57) ; J8.1@4014.17,1751.97 J8.1@4024.8,1751.97 ; J9.1@4022.83,1629.92 4024.8,1631.89 J9.1@4024.8,1637.8 4024.8,1681.1 4020.87,1685.04 3824.8,1685.04 ; 4024.8,1691.97 J8.1@4024.8,1751.97 ; R52.1@4311.03,1484.25 R52.1@4314.96,1488.19 ; R52.1@4311.03,1492.13 4311.03,1519.69 4433.07,1641.73 4518.9,1641.73 J6.1@4585.83,1708.66 ; R48.1@4519.68,1842.52 4519.68,1766.93 4521.26,1765.35 ; U11.15@4556.7,2141.73 4556.7,2029.92 4590.55,1996.06 v1(4590.55,1964.57) ; R40.2@4677.17,1728.35 4597.64,1728.35 4577.95,1708.66 4521.26,1765.35 ; J7.1@3470.08,1708.66 3489.76,1728.35 R38.2@3569.56,1728.35 ; R38.2@3569.56,1728.35 3569.56,1690.29 3599.02,1660.82 3662,1660.82 3686.22,1685.04 3824.8,1685.04 ; J9.3@3824.8,1643.7 3824.8,1685.04 ; J8.1@4024.8,1751.97 4048.43,1728.35 R39.2@4123.36,1728.35 4123.36,1675.85 4153.54,1645.67 4351.34,1645.67 4385.83,1680.16 J6.3@4385.83,1708.66 4385.83,1744.09 4407.09,1765.35 4521.26,1765.35
  Top Layer w23.62: D9.2@535.43,913.39 583.67,961.63 C18.2@648.18,961.63 659,972.44 1085.37,972.44 1262.53,795.28 v1(1460.63,795.28) ; P3.3@1586.61,698.43 P4.3@1830.71,698.43 P7.3@2070.87,698.43 P8.3@2311.02,698.43 P11.3@2551.18,698.43 P12.3@2791.34,698.43 ; pad.1@2157.48,877.95 2157.48,907.87 2186.61,937.01 U1.3@2196.85,947.24 ; C7.1@2791.34,1401.57 v1(2850.39,1342.52) 2881.89,1342.52 U5.3@2897.64,1358.27
  Top Layer w39.37: U1.3@2186.61,937.01 U1.3@2187.4,937.01 ; U1.3@2196.85,947.24 2229.34,914.75 C9.2@2229.34,874.02
  Bottom Layer w11.81: v1(2846.46,1740.16) 2866.14,1740.16 v1(2913.39,1787.4) ; v1@2917.32,1791.34 v1(2917.32,1968.5) ; J7.1@3470.08,1708.66 3471.65,1710.24 v1@3471.65,1968.5 ; J9.3@3824.8,1637.8 J8.3@3824.8,1755.91 ; J8.1@4024.8,1755.91 4024.8,1946.06 v1(4043.31,1964.57) ; J6.1@4577.95,1708.66 J6.1@4580.31,1711.02 ; J6.1@4585.83,1708.66 4590.55,1713.39 v1(4590.55,1964.57)
  Bottom Layer w23.62: v1(1460.63,795.28) 1557.48,698.43 P3.3@1586.61,698.43 ; P7.3@2070.87,698.43 2157.48,785.04 pad.1@2157.48,877.95 2157.48,912.76 2587.24,1342.52 v1(2677.17,1342.52) v1(2850.39,1342.52) ; P12.3@2791.34,698.43 3033.86,698.43 P18.2@3090.55,641.73 P18.1@3090.55,541.73
VUSB: C19.2 D9.1 D13.1 P10.1 R73.1 R74.1 R100.2 | length 695.5
  Top Layer w15: D9.1@535.43,748.03 542.31,741.15 C19.2@635.83,741.15 663.69,741.15 719.77,797.24 R100.2@719.77,799.21 719.77,801.18 770.58,851.98 770.58,856.9 R73.1@782.76,869.08 844.09,869.08 D13.1@844.42,869.41 844.42,802.49 R74.1@847.9,799.01
  Top Layer w30: P10.1@391.93,604.33 477.97,604.33 535.43,661.79 D9.1@535.43,748.03
X_LIMT: R60.1 U4.25 | length 454.2
  Top Layer w11.81: R60.1@3137.79,1196.85 3157.48,1196.85 3312.99,1352.36 U4.25@3527.56,1352.36
XTAL1: C22.1 U4.5 Y2.1 | length 561.8
  Top Layer w11.81: U4.5@3866.14,1214.57 4003.94,1214.57 ; Y2.1@4031.5,1007.87 4031.5,1187.01 4003.94,1214.57 ; 4156.51,1230.31 C22.1@4170.29,1244.09 ; C22.1@4178.16,1244.09 C22.1@4170.29,1244.09 ; 4003.94,1214.57 4033.46,1244.09 C22.1@4170.29,1244.09
XTAL2: C21.1 U4.6 Y2.2 | length 452.1
  Top Layer w11.81: U4.6@3866.14,1234.25 3982.28,1234.25 4031.5,1283.46 4031.5,1330.71 ; Y2.2@4031.5,1401.57 4031.5,1330.71 ; C21.1@4178.16,1326.77 4035.43,1326.77 4031.5,1330.71
Y_LIMT: R61.1 U4.26 | length 635
  Top Layer w11.81: R61.1@2948.82,1196.85 v1(2996.06,1196.85) ; v1(3200.79,1196.85) 3336.61,1332.68 U4.26@3527.56,1332.68
  Bottom Layer w11.81: v1(2996.06,1196.85) v1(3200.79,1196.85)
Z_LIMT: R62.1 U4.27 | length 781.7
  Top Layer w11.81: R62.1@2948.82,956.69 v1(2996.06,956.69) ; v1(3200.79,1157.48) 3204.72,1157.48 3360.24,1312.99 U4.27@3527.56,1312.99
  Bottom Layer w11.81: v1(2996.06,956.69) 3055.12,1015.75 3055.12,1110.24 3102.36,1157.48 v1(3200.79,1157.48)
pads on no net: P18.7 U4.1 U4.2 U4.3 U4.4 U4.21 U4.22 U4.32 U4.33 U4.43 U4.45 U6.9 U6.10 U6.11 U6.12 U6.14 U6.15 U8.7 U8.20 U8.25 U9.7 U9.20 U9.25 U10.7 U10.20 U10.25 U11.7 U11.20 U11.25 U15.1 U16.1

## Polygon pours and split planes (outlines as drawn)
GND on Top Layer "Keep-Out Layer-No Net" (hatched 90Degree grid 1.97 track 3.94, remove dead copper, pour order 1035): -86,3099.68 -86,302.41 5311.64,302.41 5311.64,3099.68
48V_IN on Top Layer "48V_IN_L01_P1026" (solid, remove dead copper, pour order 1026): 988.19,2867.57 988.78,2866.98 988.78,2446.57 1010.87,2424.47 1262.35,2424.47 1262.35,2611.09 1463.14,2811.87 1463.14,2865.35 1441.24,2887.25 1394.4,2887.25 1254.45,2747.31 1190.7,2747.31 1067.93,2870.08 988.73,2870.08
NetD5_2 on Top Layer "Keep-Out Layer-No Net" (hatched 90Degree grid 1.97 track 3.94, remove dead copper, pour order 1018): 996.06,1618.11 586.61,1618.11 547.24,1578.74 547.24,1287.4 724.41,1110.24 807.09,1027.56 1102.36,1027.56 1145.67,1027.56 1192.91,1074.8 1192.91,1433.07 1255.91,1496.06 1433.07,1673.23 1433.07,1759.84 1397.64,1759.84 1389.76,1751.97 1389.76,1704.72 1303.15,1618.11 996.06,1618.11
NetC10_1 on Top Layer "Keep-Out Layer-No Net" (hatched 90Degree grid 1.97 track 3.94, remove dead copper, pour order 1017): 1464.57,1681.1 1212.6,1429.13 1212.6,1322.83 1212.6,1204.72 1236.22,1181.1 1374.02,1181.1 1389.76,1196.85 1425.2,1196.85 1496.06,1267.72 1496.06,1685.04 1468.5,1685.04 1464.57,1681.1
48V1 on Top Layer "Keep-Out Layer-No Net" (hatched 90Degree grid 3.15 track 7.87, remove dead copper, pour order 1020): 547.78,2232.28 876.85,2232.28 915.48,2192.91 1210.95,1891.73 1335.17,1891.73 1362.2,1864.17 1362.2,1834.65 1331.31,1803.15 1303.57,1803.15 1006.87,1803.15 906.44,1700.79 902.58,1696.85 775.12,1696.85 755.81,1716.54 755.81,1854.79 782.85,1882.35 782.85,2070.62 782.61,2070.87 782.61,2099.21 764.07,2118.11 748.62,2133.86 578.68,2133.86 569.32,2133.86 547.24,2156.36 547.24,2231.74 547.78,2232.28
48V_IN on Top Layer "Keep-Out Layer-No Net" (hatched 90Degree grid 3.15 track 7.87, remove dead copper, pour order 1016): 610.48,2102.12 748.27,2102.12 763.78,2086.61 763.78,1897.64 744.09,1877.95 586.61,1877.95 566.93,1897.64 547.79,1916.78 547.79,2051.18 547.79,2069.29 572.99,2094.49 579.91,2101.42 611.18,2101.42
24V on Top Layer "Keep-Out Layer-No Net" (hatched 90Degree grid 3.15 track 7.87, remove dead copper, pour order 1025): 4688.96,2531.5 4602.35,2531.5 4574.79,2503.94 4574.79,2374.02 4578.73,2370.08 4669.28,2370.08 4673.22,2374.02 4688.96,2389.76 4688.96,2531.5
24V on Top Layer "Keep-Out Layer-No Net" (hatched 90Degree grid 3.15 track 7.87, remove dead copper, pour order 1024): 4134.63,2531.5 4048.02,2531.5 4020.46,2503.94 4020.46,2374.02 4024.4,2370.08 4114.95,2370.08 4118.89,2374.02 4134.63,2389.76 4134.63,2531.5
24V on Top Layer "Keep-Out Layer-No Net" (hatched 90Degree grid 3.15 track 7.87, remove dead copper, pour order 1022): 3586.44,2537.63 3499.82,2537.63 3472.26,2510.07 3472.26,2380.15 3476.2,2376.21 3566.75,2376.21 3570.69,2380.15 3586.44,2395.9 3586.44,2537.63
24V on Top Layer "Keep-Out Layer-No Net" (hatched 90Degree grid 3.15 track 7.87, remove dead copper, pour order 1019): 3027.56,2539.37 2940.94,2539.37 2913.39,2511.81 2913.39,2381.89 2917.32,2377.95 3007.87,2377.95 3011.81,2381.89 3027.56,2397.64 3027.56,2539.37
NetD6_2 on Top Layer "Keep-Out Layer-No Net" (hatched 90Degree grid 1.97 track 3.94, remove dead copper, pour order 1015): 2019.68,1877.95 1775.59,1877.95 1716.54,1937.01 1716.54,2346.46 1759.84,2389.76 2464.57,2389.76 2476.38,2377.95 2476.38,1948.82 2460.63,1933.07 2405.51,1877.95 1996.06,1877.95
48V_SPN- on Top Layer "Keep-Out Layer-No Net" (hatched 90Degree grid 1.97 track 3.94, remove dead copper, pour order 1014): 2031.5,2822.83 1877.95,2976.38 1539.37,2976.38 1515.75,2952.76 1492.13,2929.13 1492.13,2791.34 1307.09,2606.3 1307.09,2444.88 1307.09,2429.13 1330.71,2405.51 1535.43,2405.51 1539.37,2409.45 1566.93,2437.01 1566.93,2708.66 1566.93,2716.54 1625.98,2775.59 1673.23,2822.83 1858.27,2822.83
GND on Bottom Layer "Keep-Out Layer-No Net" (hatched 90Degree grid 1.97 track 3.94, remove dead copper, pour order 1033): -98.32,3099.68 5327.95,3099.68 5327.94,298 -120.87,298 -120.87,3077.13
JP15_2 on Bottom Layer "JP15_2_L02_P1031" (solid, remove dead copper, pour order 1031): 172.37,1945.37 183.5,1956.5 405.7,1960.08 487.33,1878.44 487.33,1360.01 451.9,1324.57 171.13,1324.57 160.56,1335.14 161.55,1336.12 161.55,1934.55
NetK1_1 on Bottom Layer "NETK1_1_L02_P1027" (solid, remove dead copper, pour order 1027): 476.38,2625.98 185.04,2625.98 147.64,2588.58 147.64,2003.61 157.71,1993.53 451.32,1993.53 480.31,2022.53 480.32,2240.16 389.76,2330.71 389.76,2433.07 476.38,2519.69
NetD6_2 on Bottom Layer "Keep-Out Layer-No Net" (hatched 90Degree grid 1.97 track 3.94, remove dead copper, pour order 1021): 2188.98,1625.98 1933.07,1625.98 1712.6,1872.2 1712.6,2448.16 1751.97,2492.13 2480.32,2492.13 2492.13,2478.94 2492.13,1709.52 2437.01,1647.97 2417.32,1625.98 2188.98,1625.98
NetD5_2 on Bottom Layer "Keep-Out Layer-No Net" (hatched 90Degree grid 1.97 track 3.94, remove dead copper, pour order 1023): 799.21,1035.43 1421.26,1035.43 1484.25,1098.43 1484.25,1555.12 1421.26,1618.11 732.28,1618.11 677.17,1562.99 677.17,1157.48 799.21,1035.43

## Keep-outs
Keep-Out Layer:
  circle w5: c3070.87,2204.72 r61.02
  circle w5: c196.85,196.85 r68.9
  circle w5: c4960.63,2834.65 r68.9
  circle w5: c4960.63,551.18 r68.9
  circle w5: c4173.23,2204.72 r61.02
  circle w5: c196.85,3188.98 r68.9
  circle w5: c4921.26,3188.98 r68.9
  circle w5: c4921.26,196.85 r68.9
  lines w5: 0,196.85 ccw(c196.85,196.85) 196.85,0 4921.26,0 ccw(c4921.26,196.85) 5118.11,196.85 5118.11,3188.98 ccw(c4921.26,3188.98) 4921.26,3385.83 196.85,3385.83 ccw(c196.85,3188.98) 0,3188.98 0,196.85

## Other copper
Top Layer:
  rectangle net 48V_SPN-: 2231,2747 2343.06,2817.47
  rectangle net GND: 3579.28,554.4 3716.54,653.54
  pour cut-out: 553,2255.91 520,2255.99 520,2075.52 526.45,2075.52 556,2103.63 556,2121 524,2153 525,2154 525,2242 535,2242 550,2257
  pour cut-out: 150.86,2910.69 151.61,2911.44 217.16,2911.44 217.16,2675.63 217.08,2675.55 209.63,2683 201.59,2683 201.59,2799.11 150.86,2849.84 150.86,2913.45 148.18,2916.12
Bottom Layer:
  pour cut-out: 284.01,659.75 342.75,659.75 360,677 374.34,662.66 413.29,662.66 435.58,684.96 435.58,632.53 405.81,632.53 394.55,643.79 364.75,614 352,614 352,621.11 316.81,656.29 289.92,656.29
  pour cut-out: 464.61,1995 502.35,2032.74 502.71,2032.74 502.71,1891.71 497,1886 447.39,1935.61 447.39,1986.94 499.1,2038.65 502.71,2038.65
  pour cut-out: 474.95,2648.38 475.57,2649 519.35,2649 519.35,2491.81 475.63,2448.09 456.62,2448.09 409.99,2401.47 401,2410.47 401,2434.86 490.49,2524.35 490.49,2642.98 482.22,2642.98 476.92,2648.27
  pour cut-out: 120.38,1995.34 459.8,1995.34 459.8,1950.06 120.38,1950.06

## Silkscreen, mask and mechanical layers (free items; w line width, h text height)
Top Overlay:
  circle w11.81: c4553.15,948.43 r5.91
  circle w11.81: c4553.15,983.86 r5.91
  circle w11.81: c4505.91,948.43 r5.91
  circle w11.81: c4505.91,983.86 r5.91
  circle w11.81: c4505.91,1042.52 r5.91
  circle w11.81: c4505.91,1077.95 r5.91
  circle w11.81: c4553.15,1136.61 r5.91
  circle w11.81: c4553.15,1172.05 r5.91
  circle w11.81: c4458.66,983.86 r5.91
  circle w11.81: c4458.66,948.43 r5.91
  circle w11.81: c4458.66,1077.95 r5.91
  circle w11.81: c4458.66,1042.52 r5.91
  circle w11.81: c4458.66,1172.05 r5.91
  circle w11.81: c4458.66,1136.61 r5.91
  circle w11.81: c4458.66,1230.71 r5.91
  circle w11.81: c4458.66,1266.14 r5.91
  lines w7.87: 486.22,320.33 486.22,401.57 ; 614.04,2981.39 614.04,3070.87 ; 625.98,342.52 625.98,255.91 486.22,255.91 486.22,346.46 714.11,346.46 714.11,401.04 ; 726.38,401.57 726.38,346.46 954.27,346.46 954.27,401.04 ; 771.65,2981.39 771.65,3039.37 ; 921.04,2981.39 921.04,3070.87 ; 934.5,2986.77 934.5,3070.87 ; 966.54,401.57 966.54,346.46 1194.43,346.46 1194.43,401.04 ; 1133.86,2986.77 1133.86,3039.37 ; 1207.15,402.11 1207.15,346.46 1435.04,346.46 1435.04,401.57 ; 1330.71,2986.77 1330.71,3039.37 ; 1447.31,320.87 1447.31,402.11 ; 1527.56,2986.77 1527.56,3039.37 ; 1598.43,342.52 1598.43,216.54 1447.31,216.54 1447.31,346.46 1675.2,346.46 1675.2,401.57 ; 1691.4,402.11 1691.4,346.46 1919.29,346.46 1919.29,401.57 ; 1719.05,2986.77 1719.05,3070.87 ; 1931.56,402.11 1931.56,346.46 2159.45,346.46 2159.45,401.57 ; 2171.72,402.11 2171.72,346.46 2399.61,346.46 2399.61,401.57 ; 2411.87,402.11 2411.87,346.46 2639.76,346.46 2639.76,401.57 ; 2561.69,2982.28 2561.69,3039.37 3051.69,3039.37 3051.69,2982.28 ; 2652.03,402.11 2652.03,346.46 2879.92,346.46 2879.92,401.57 ; 2897.84,408.87 2897.84,346.46 3242.01,346.46 3595.08,346.46 3595.08,408.33 ; 3064.84,2982.28 3064.84,3039.37 3554.84,3039.37 3554.84,2982.28 ; 3567.2,2982.28 3567.2,3039.37 4057.2,3039.37 4057.2,2982.28 ; 3685.5,413.92 3685.5,346.46 3921.26,346.46 3921.26,413.92 ; 4069.84,2980.31 4069.84,3039.37 4559.84,3039.37 4559.84,2980.31 ; 4257.15,402.11 4257.15,346.46 4648.18,346.46 4648.18,399.06 ; 4422.83,1389.37 4422.83,1295.28 ; 4590.55,1389.37 4590.55,1295.28 ; 4769.29,1389.37 4769.29,1295.28 ; 4874.55,1144.55 4793.31,1144.55 4793.31,1537.8 4874.55,1537.8 ; 4875.34,732.74 4794.09,732.74 4794.09,1125.98 4875.34,1125.98 ; 4876.52,1551.91 4795.27,1551.91 4795.27,1851.12 4876.52,1851.12 ; 4876.52,1862.93 4795.27,1862.93 4795.27,2162.14 4876.52,2162.14 ; 4878.49,2177.17 4797.24,2177.17 4797.24,2476.38 4878.49,2476.38 ; 4422.83,1012.99 4422.83,918.9 4590.55,918.9 ; 4422.83,1012.99 4422.83,1107.09 ; 4422.83,1012.99 4590.55,1012.99 ; 4422.83,1107.09 4422.83,1201.18 ; 4422.83,1107.09 4590.55,1107.09 ; 4422.83,1201.18 4590.55,1201.18 ; 4422.83,1201.18 4422.83,1295.28 ; 4422.83,1295.28 4590.55,1295.28 ; 4590.55,918.9 4590.55,1012.99 ; 4590.55,918.9 4769.29,918.9 4769.29,1012.99 ; 4590.55,1012.99 4590.55,1107.09 ; 4590.55,1012.99 4769.29,1012.99 ; 4590.55,1107.09 4590.55,1201.18 ; 4590.55,1107.09 4769.29,1107.09 ; 4590.55,1201.18 4590.55,1295.28 ; 4590.55,1201.18 4769.29,1201.18 ; 4590.55,1295.28 4769.29,1295.28 ; 4769.29,1012.99 4769.29,1107.09 ; 4769.29,1107.09 4769.29,1201.18 ; 4769.29,1201.18 4769.29,1295.28 ; 614.04,3039.37 614.04,3094.49 921.04,3094.49 921.04,3039.37 614.04,3039.37 ; 934.5,3039.37 934.5,3094.49 1719.05,3094.49 1719.05,3039.37 934.5,3039.37 ; 2637.8,2027.56 4606.3,2027.56 4606.3,2381.89 2637.8,2381.89 2637.8,2027.56 ; 4047.24,346.46 4047.24,397.64 4255.91,397.64 4255.91,346.46 4047.24,346.46
  text "DC24V" at 696.85,3051.18 h27.56
  text "DC48V" at 1236.22,3051.18 h27.56
  text "48V+" at 984.25,3000 h27.56
  text "48V-" at 1185.04,3000 h27.56
  text "SPN+" at 1381.89,3000 h27.56
  text "SPN-" at 1578.74,3000 h27.56
  text "X-MOTOR" at 2700.79,2996.06 h27.56
  text "Y1-MOTOR" at 3188.98,2996.06 h27.56
  text "Y2-MOTOR" at 3696.85,2996.06 h27.56
  text "Z-MOTOR" at 4228.35,2996.06 h27.56
  text "SPN+" at 645.67,2992.13 h27.56
  text "SPN-" at 803.15,2988.19 h27.56
  text "DC24V" at 15.75,2381.89 h27.56
  text "GND" at 4858.27,2358.27 h27.56 r90
  text "EX" at 4858.27,2240.16 h27.56 r90
  text "Z" at 4736.22,1980.32 h27.56
  text "-12V+" at 4860.24,1904.33 h27.56 r90
  text "Y1" at 3673.23,1860.3 h27.56
  text "Y2" at 4224.41,1857.15 h27.56
  text "X" at 3118.11,1850.85 h27.56
  text "MZ-EXP" at 4244.09,1771.65 h27.56
  text "MX-EXP" at 3125.98,1767.72 h27.56
  text "-DIR+" at 3141.73,1606.3 h27.56
  text "-PUL+" at 3342.52,1606.3 h27.56
  text "-DIR+" at 4257.48,1606.3 h27.56
  text "-PUL+" at 4458.27,1606.3 h27.56
  text "GND PWM" at 4856.44,1590.55 h27.56 r90
  text "-DIR+" at 3696.46,1535.43 h27.56
  text "-PUL+" at 3897.24,1535.43 h27.56
  text "MY-EXP" at 3795.73,1488.64 h27.56
  text "1/16" at 4637.8,1346.46 h27.56
  text "STEP" at 4633.86,1307.09 h27.56
  text "1/8" at 4637.8,1252.36 h27.56
  text "STEP" at 4633.86,1212.99 h27.56
  text "1/4" at 4637.8,1158.27 h27.56
  text "+12V-   PWM" at 4854.33,1157.48 h27.56 r90
  text "STEP" at 4633.86,1118.9 h27.56
  text "1/2" at 4637.8,1064.17 h27.56
  text "STEP" at 4633.86,1024.8 h27.56
  text "FULL" at 4637.8,970.08 h27.56
  text "STEP" at 4633.86,930.71 h27.56
  text "+24V- PWM" at 4858.27,814.96 h27.56 r90
  text "Offline Plug" at 3102.36,366.14 h27.56
  text "PROBE" at 775.59,362.2 h27.56
  text "Z+" at 2500,362.2 h27.56
  text "Z-" at 2740.16,362.2 h27.56
  text "RESET" at 3740.16,362.2 h27.56
  text "RESET" at 539.37,358.27 h27.56
  text "RUN" at 1043.31,358.27 h27.56
  text "HOLD" at 1271.65,358.27 h27.56
  text "X+" at 1535.43,358.27 h27.56
  text "X-" at 1779.53,358.27 h27.56
  text "Y+" at 2027.56,358.27 h27.56
  text "Y-" at 2255.91,358.27 h27.56
  text "RUN" at 4059.06,358.27 h27.56
  text "3V3" at 4161.42,358.27 h27.56
  text "-DC24V+" at 4354.33,358.27 h27.56
  text "+5V" at 1464.57,307.09 h27.56
  text "GND" at 503.94,303.15 h27.56
  text "LY-3axis-5.2-V3.3" at 768.26,271.65 h78.74
  text "Ax" at 503.94,267.72 h27.56
  text "GND" at 1464.57,267.72 h27.56
  text "S" at 1488.19,228.35 h27.56
Mechanical 15:
  circle w5: c4960.63,551.18 r137.8
  circle w5: c4960.63,2834.65 r137.8
  lines w5: 0,393.7 5118.11,393.7 ; 0,2992.13 5118.11,2992.13